# Altium PCB RF-UNIT.PcbDoc (part 1 of 4)
Units mm, origin at the board's own origin, x right, y up, seen from the top; angles counter-clockwise.
Board outline 187 x 77 mm, 2 copper layers (Top Layer, Top, Bottom Layer, Bottom); 271 components, 171 nets, 804 pads, 2169 vias.
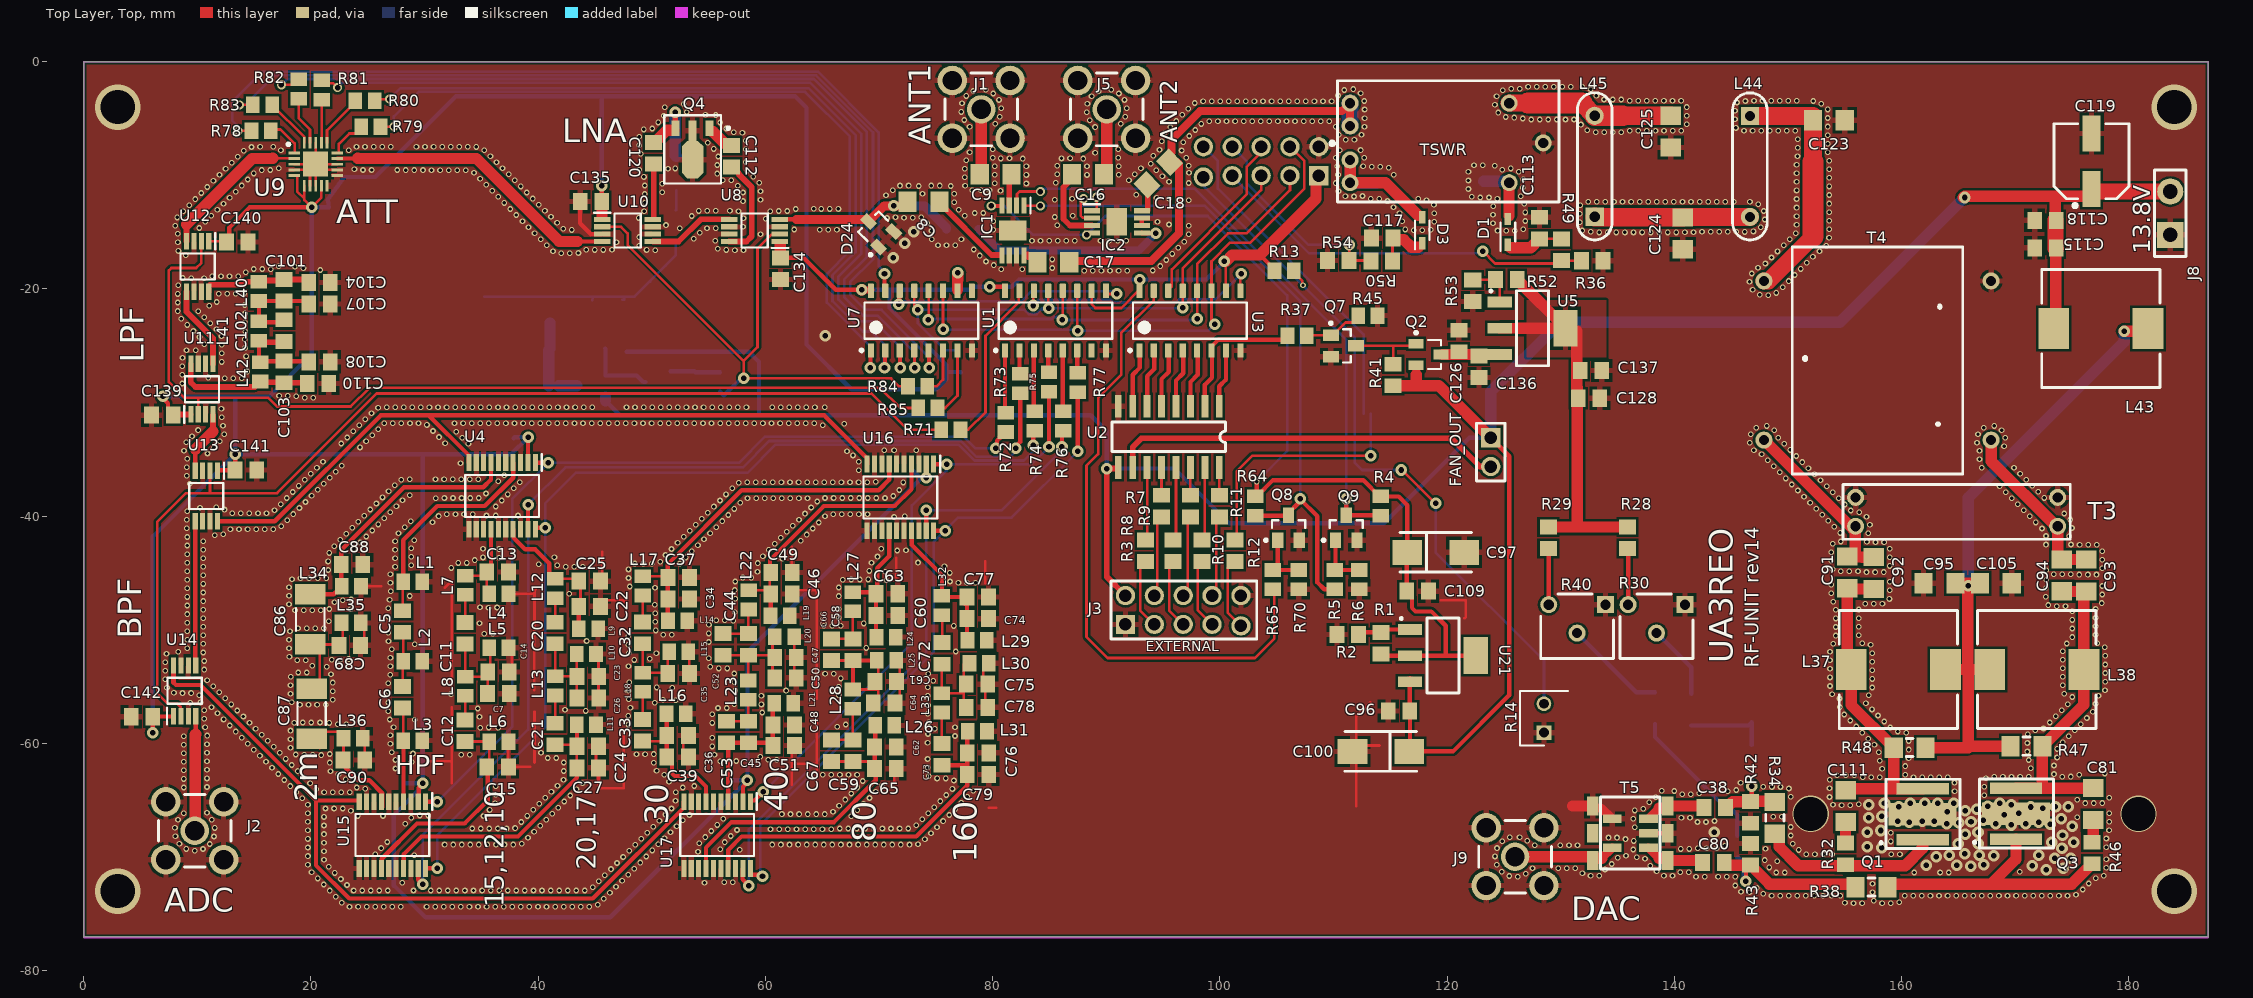
[diagram p0: Top Layer, Top view]
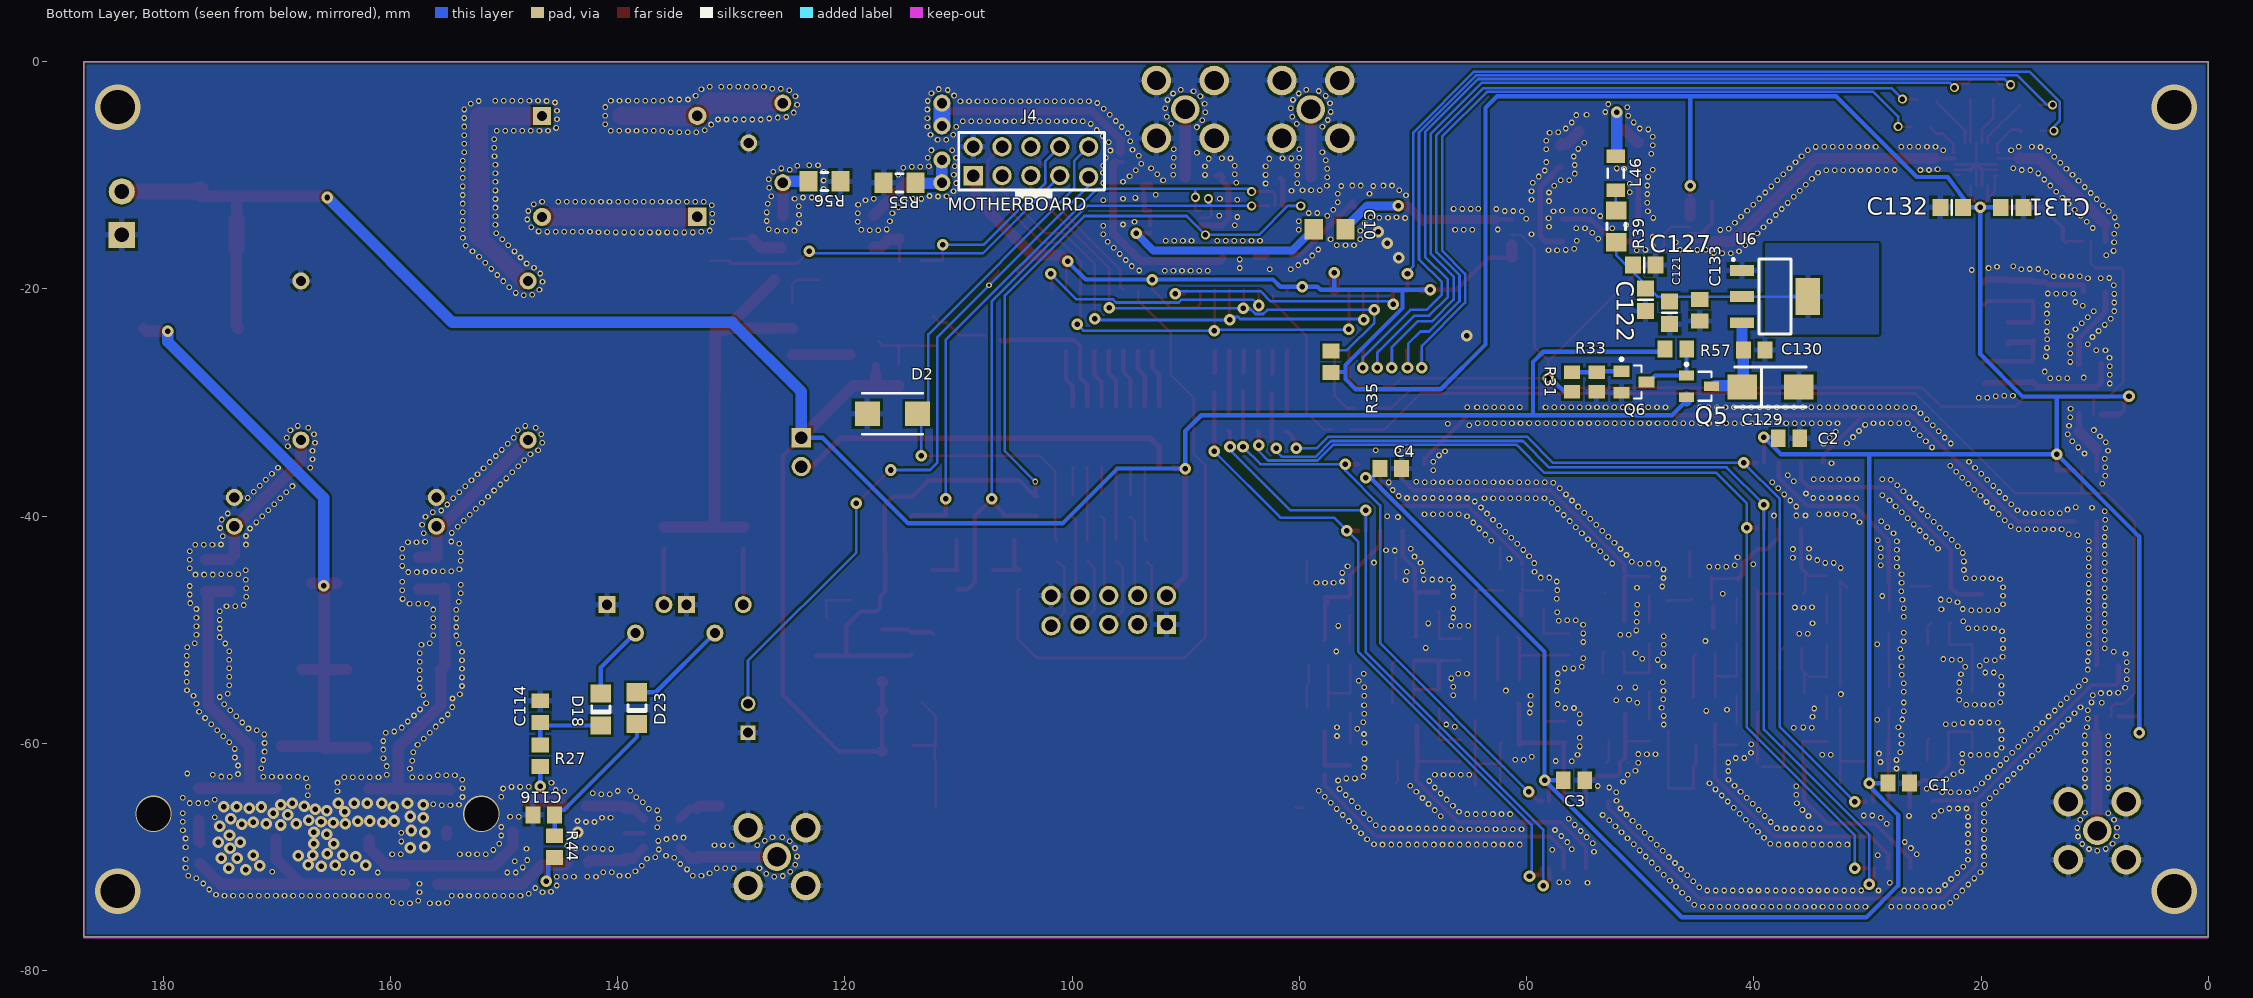
[diagram p1: Bottom Layer, Bottom view, seen from below]

## Layer stack, top to bottom
Top Solder, Top Mask: solder mask 0.0102, Solder Resist, Dk 3.5
Top Layer, Top: signal copper 0.0356
Dielectric 1: dielectric 0.32, FR-4, Dk 4.8
Bottom Layer, Bottom: signal copper 0.0356
Bottom Solder, Bot Mask: solder mask 0.0102, Solder Resist, Dk 3.5

## Board outline
0,-77 187,-77 187,0 0,0

## Design rules (kind name [scope] priority, off if disabled: settings)
BoardOutlineClearance [All] p1: gap=0.2 ignorepadtopadclearanceinfootprint=FALSE except(0.4: Arc-SplitBarrior Arc-SplitContinuation Track-SplitBarrior Track-SplitContinuation SMDPad-SplitBarrior SMDPad-SplitContinuation THPad-SplitBarrior THPad-SplitContinuation Via-SplitBarrior Via-SplitContinuation Fill-SplitBarrior Fill-SplitContinuation Poly-SplitBarrior Poly-SplitContinuation Region-SplitBarrior Region-SplitContinuation Text-SplitBarrior Text-SplitContinuation)
Clearance "Clearance Bottom Layer" [OnLayer('Bottom Layer')] p1: gap=0.203 ignorepadtopadclearanceinfootprint=TRUE except(0.254: Arc-Text Track-Text SMDPad-Text THPad-Text Via-Text Fill-Text Poly-Text Region-Text Text-Text)
Clearance "Clearance Top Layer" [OnLayer('Top Layer')] p2: gap=0.203 ignorepadtopadclearanceinfootprint=TRUE except(0.254: Arc-Text Track-Text SMDPad-Text THPad-Text Via-Text Fill-Text Poly-Text Region-Text Text-Text)
Clearance [All] p3: gap=0.2 ignorepadtopadclearanceinfootprint=FALSE except(0.089: Arc-Arc Arc-Track Arc-SMDPad Track-Track Track-SMDPad SMDPad-SMDPad; 0.127: Arc-Via Track-Via SMDPad-Via THPad-Via Via-Via; 0.254: Arc-Text Track-Text SMDPad-Text THPad-Text Via-Text Fill-Text Poly-Text Region-Text Text-Text)
HoleSize [All] p1: absolutevalues=TRUE maxlimit=6.3 minlimit=0.2 maxpercent=80.000 minpercent=20.000
MinimumAnnularRing [All] p1: minimumring=0.076
MinimumSolderMaskSliver [All] p1: minsoldermaskwidth=0.01
PolygonConnect PolygonConnect_1 [All] p1: thpad.connectstyle=Relief thpad.reliefconductorwidth=0.508 thpad.reliefentries=4 thpad.polygonreliefangle="90 Angle" thpad.airgapwidth=0.254 smdpad.connectstyle=Relief smdpad.reliefconductorwidth=0.508 smdpad.reliefentries=4 smdpad.polygonreliefangle="90 Angle" smdpad.airgapwidth=0.254 via.connectstyle=Direct via.reliefconductorwidth=0.508 via.reliefentries=4 via.polygonreliefangle="90 Angle" via.airgapwidth=0.254
RoomDefinition "SWR Tandem Match" [InComponentClass('SWR Tandem Match')] p1: confinementstyle=ConfineIn formatcopy=TRUE lockcomponents=FALSE outline 0,-77 187,-77 187,-0.127 0,-0.127
RoomDefinition RF_AMP [InComponentClass('RF_AMP')] p2: confinementstyle=ConfineIn formatcopy=TRUE lockcomponents=FALSE outline 0,-77 187,-77 187,0 0,0
RoomDefinition CONTROL [InComponentClass('CONTROL')] p3: confinementstyle=ConfineIn formatcopy=TRUE lockcomponents=FALSE outline 0,-77 187,-77 187,0 0,0
RoomDefinition CONN [InComponentClass('CONN')] p4: confinementstyle=ConfineIn formatcopy=TRUE lockcomponents=FALSE outline 0,-77 187,-77 187,0 0,0
RoomDefinition BPF [InComponentClass('BPF')] p5: confinementstyle=ConfineIn formatcopy=TRUE lockcomponents=FALSE outline 0,-77 187,-77 187,-0.127 0,-0.127
RoomDefinition LNA [InComponentClass('LNA')] p6 off: confinementstyle=ConfineIn formatcopy=TRUE lockcomponents=FALSE outline 0,-77 187,-77 187,0 0,0
RoutingCorners [All] p1: cornerstyle=Round minsetback=2.54 maxsetback=2.54
RoutingVias [All] p1: holewidth=0.5 width=1 viastyle="Through Hole" minholewidth=0.2 minwidth=0.45 maxholewidth=1 maxwidth=2
SilkToSilkClearance [All] p1: silktosilkclearance=0.01
SilkToSolderMaskClearance [IsPad] p1: minsilkscreentomaskgap=0.01 clearancetoexposedcopper=TRUE
SolderMaskExpansion [All] p1: expansion=0.102
Width [All] p1: maxlimit=2.54 minlimit=0.089 preferedwidth=0.381
25 further rules are at their usual default settings.

## Classes and differential pairs
component class "SWR Tandem Match": C113 C117 C123 C124 C125 D1 D3 L44 L45 R36 R49 R50 R54 R55 R56 TSWR
component class RF_AMP: C38 C80 C81 C91 C92 C93 C94 C95 C105 C111 C114 C115 C116 C118 C119 C126 C128 C136 C137 D18 D23 J8 L37 L38 L43 Q1 Q2 Q3 Q7 R27 R28 R29 R30 R32 R34 R37 R38 R40 R41 R42 R43 R44 R45 R46 R47 R48 R52 R53 T3 T4 T5 U5
component class LNA: C101 C102 C103 C104 C107 C108 C110 C112 C120 C121 C122 C127 C129 C130 C131 C132 C133 C134 C135 C139 C140 L40 L41 L42 L46 Q4 Q5 Q6 R31 R33 R39 R57 U6 U8 U9 U10 U11 U12
component class CONTROL: FAN_OUT Q8 Q9 R4 R5 R6 R13 R14 R35 R64 R65 R70 R71 R72 R73 R74 R75 R76 R77 R78 R79 R80 R81 R82 R83 R84 R85 U1 U2 U3 U7
component class CONN: C8 C9 C10 C16 C17 C18 C96 C97 C100 C109 D2 D24 IC1 IC2 J1 J2 J3 J4 J5 J9 R1 R2 R3 R7 R8 R9 R10 R11 R12 U21
component class BPF: C1 C2 C3 C4 C5 C6 C7 C11 C12 C13 C14 C15 C20 C21 C22 C23 C24 C25 C26 C27 C32 C33 C34 C35 C36 C37 C39 C44 C45 C46 C47 C48 C49 C50 C51 C52 C53 C58 C59 C60 C61 C62 C63 C64 C65 C66 C67 C72 C73 C74 C75 C76 C77 C78 C79 C86 C87 C88 C89 C90 C141 C142 L1 L2 L3 L4 L5 L6 L7 L8 L9 L10 L11 L12 L13 L14 L15 L16 L17 L18 L19 L20 L21 L22 L23 L24 L25 L26 L27 L28 L29 L30 L31 L32 L33 L34 L35 L36 U4 U13 U14 U15 U16 U17

## Components (designator, comment, footprint, x,y, rotation, side; value= is the part's Value field where it differs from the comment)
C1 "CAP_0805" CAP_0805 27.051,-63.5 r0 bottom value=100n
C2 "CAP_0805" CAP_0805 36.703,-33.147 r0 bottom value=100n
C3 "CAP_0805" CAP_0805 55.626,-63.246 r0 bottom value=100n
C4 "CAP_0805" CAP_0805 71.755,-35.814 r0 bottom value=100n
C5 "CAP_0805" CAP_0805 28.07,-49.476 r90 top value=47pF
C6 "CAP_0805" CAP_0805 28.07,-56.143 r90 top value=33pF
C7 "CAP_0805" CAP_0805 36.703,-55.626 r180 top value=39pF
C8 "CAP_1206" CAP_1206 73.914,-12.319 r180 top value="2.2uF 100V"
C9 "CAP_1206" CAP_1206 80.264,-9.906 r0 top value="2.2uF 100V"
C10 "CAP_1206" CAP_1206 77.343,-14.732 r180 bottom value="2.2uF 100V"
C11 "CAP_0805" CAP_0805 33.577,-50.515 r90 top value=75pF
C12 "CAP_0805" CAP_0805 33.577,-59.088 r90 top value=61pF
C13 "CAP_0805" CAP_0805 36.637,-44.915 r180 top value=47pF
C14 "CAP_0805" CAP_0805 36.715,-53.721 r180 top value=100pF
C15 "CAP_0805" CAP_0805 36.637,-62.06 r180 top value=120pF
C16 "CAP_1206" CAP_1206 88.392,-9.906 r180 top value="2.2uF 100V"
C17 "CAP_1206" CAP_1206 85.344,-17.653 r0 top value="2.2uF 100V"
C18 "CAP_1206" CAP_1206 94.585,-9.841 r45 top value="2.2uF 100V"
C20 "CAP_0805" CAP_0805 41.504,-50.485 r90 top value=27pF
C21 "CAP_0805" CAP_0805 41.504,-59.375 r90 top value=27pF
C22 "CAP_0805" CAP_0805 44.731,-47.943 r180 top value=68pF
C23 "CAP_0805" CAP_0805 44.577,-54.102 r180 top value=120pF
C24 "CAP_0805" CAP_0805 44.564,-60.252 r180 top value=68pF
C25 "CAP_0805" CAP_0805 44.731,-45.72 r180 top value=10pF
C26 "CAP_0805" CAP_0805 44.577,-56.007 r180 top value=27pF
C27 "CAP_0805" CAP_0805 44.564,-62.157 r180 top value=10pF
C32 "CAP_0805" CAP_0805 49.192,-50.479 r90 top value=47pF
C33 "CAP_0805" CAP_0805 49.192,-59.052 r90 top value=47pF
C34 "CAP_0805" CAP_0805 52.57,-47.292 r180 top value=120pF
C35 "CAP_0805" CAP_0805 52.565,-53.85 r180 top value=220pF
C36 "CAP_0805" CAP_0805 52.478,-59.309 r180 top value=120pF
C37 "CAP_0805" CAP_0805 52.57,-45.387 r180 top value=33pF
C38 "CAP_0805" CAP_0805 143.764,-65.659 r180 top value=100n
C39 "CAP_0805" CAP_0805 52.478,-61.214 r180 top value=33pF
C44 "CAP_0805" CAP_0805 58.496,-51.49 r90 top value=51pF
C45 "CAP_0805" CAP_0805 58.496,-59.203 r90 top value=51pF
C46 "CAP_0805" CAP_0805 61.622,-46.863 r180 top value=220pF
C47 "CAP_0805" CAP_0805 61.976,-52.451 r180 top value=360pF
C48 "CAP_0805" CAP_0805 61.81,-58.377 r180 top value=220pF
C49 "CAP_0805" CAP_0805 61.622,-44.958 r180 top value=33pF
C50 "CAP_0805" CAP_0805 61.976,-54.229 r180 top value=51pF
C51 "CAP_0805" CAP_0805 61.81,-60.19 r180 top value=33pF
C52 "CAP_0805" CAP_0805 56.273,-51.49 r90 top value=18pF
C53 "CAP_0805" CAP_0805 56.591,-59.203 r90 top value=18pF
C58 "CAP_0805" CAP_0805 67.706,-51.955 r90 top value=100pF
C59 "CAP_0805" CAP_0805 67.706,-60.845 r90 top value=100pF
C60 "CAP_0805" CAP_0805 70.893,-48.736 r180 top value=360pF
C61 "CAP_0805" CAP_0805 70.793,-54.562 r180 top value=680pF
C62 "CAP_0805" CAP_0805 70.766,-60.325 r180 top value=360pF
C63 "CAP_0805" CAP_0805 70.893,-46.831 r180 top value=68pF
C64 "CAP_0805" CAP_0805 70.654,-56.467 r180 top value=100pF
C65 "CAP_0805" CAP_0805 70.766,-62.23 r180 top value=68pF
C66 "CAP_0805" CAP_0805 65.801,-51.955 r90 top value=39pF
C67 "CAP_0805" CAP_0805 65.801,-60.845 r90 top value=39pF
C72 "CAP_0805" CAP_0805 75.563,-52.282 r90 top value=200pF
C73 "CAP_0805" CAP_0805 75.54,-61.172 r90 top value=200pF
C74 "CAP_0805" CAP_0805 78.894,-49.022 r180 top value=820pF
C75 "CAP_0805" CAP_0805 78.829,-54.791 r180 top value=1000pF
C76 "CAP_0805" CAP_0805 78.911,-60.833 r180 top value=820pF
C77 "CAP_0805" CAP_0805 78.894,-47.117 r180 top value=120pF
C78 "CAP_0805" CAP_0805 78.829,-56.823 r180 top value=220pF
C79 "CAP_0805" CAP_0805 78.911,-62.738 r180 top value=120pF
C80 "CAP_0805" CAP_0805 143.637,-70.485 r180 top value=100n
C81 "CAP_1206" CAP_1206 176.866,-65.341 r90 top value=47nF
C86 "CAP_0805" 5025[2010] 19.939,-49.081 r90 top value=6.5-30pF
C87 "CAP_0805" 5025[2010] 20.066,-57.377 r90 top value=6.5-30pF
C88 "CAP_0805" CAP_0805 23.825,-44.268 r180 top value=120pF
C89 "CAP_0805" CAP_0805 23.622,-51.367 r180 top value=100pF
C90 "CAP_0805" CAP_0805 23.984,-61.463 r180 top value=120pF
C91 "CAP_1206" CAP_1206 155.219,-44.946 r90 top value="2.2uF 100V"
C92 "CAP_1206" CAP_1206 157.533,-45.008 r90 top value="1n8 100V"
C93 "CAP_1206" CAP_1206 176.257,-45.229 r90 top value="2.2uF 100V"
C94 "CAP_1206" CAP_1206 174.108,-45.213 r90 top value="1n8 100V"
C95 "CAP_1206" CAP_1206 163.338,-45.911 r180 top value="2.2uF 100V"
C96 "100n" CAP_0805 115.57,-57.15 r0 top
C97 "10uF" CAPAE_5.3x5.3h6.1 118.999,-43.18 r0 top
C100 "10uF" CAPAE_5.3x5.3h6.1 114.173,-60.706 r180 top
C101 "CAP_0805" CAP_0805 17.653,-20.32 r90 top value=18pF
C102 "CAP_0805" CAP_0805 17.653,-23.876 r90 top value=75pF
C103 "CAP_0805" CAP_0805 17.651,-27.505 r90 top value=33pF
C104 "CAP_0805" CAP_0805 20.955,-19.431 r180 top value=18pF
C105 "CAP_1206" CAP_1206 168.291,-45.898 r0 top value="1n8 100V"
C107 "CAP_0805" CAP_0805 20.955,-21.336 r180 top value=47pF
C108 "CAP_0805" CAP_0805 20.955,-26.416 r180 top value=51pF
C109 "100n" CAP_0805 117.602,-46.609 r180 top
C110 "CAP_0805" CAP_0805 20.828,-28.321 r180 top value=68pF
C111 "CAP_1206" CAP_1206 155.067,-65.532 r90 top value=47nF
C112 "CAP_0805" CAP_0805 57.023,-8.128 r270 top value=10n
C113 "CAP_0805" CAP_0805 128.132,-14.854 r90 top value=100nF
C114 "CAP_0805" CAP_0805 146.812,-57.404 r90 bottom value=100n
C115 "CAP_0805" CAP_0805 172.466,-16.383 r0 top value=1nF
C116 "CAP_0805" CAP_0805 146.304,-66.294 r0 bottom value=100n
C117 "CAP_0805" CAP_0805 114.086,-15.533 r0 top value=100nF
C118 "CAP_0805" CAP_0805 172.466,-13.97 r0 top value=100nF
C119 "CAPAE_6.6x6.6h5.4" CAPAE_6.6x6.6h5.4 176.721,-8.855 r90 top value=47uF
C120 "CAP_0805" CAP_0805 50.165,-8.255 r90 top value=10n
C121 "CAP_0805" 6-0805_M 47.416,-22.107 r90 bottom value=10n
C122 "CAP_0805" 6-0805_M 49.53,-20.955 r90 bottom value=1n
C123 "CAP_1206" CAP_1206 153.593,-5.147 r180 top value=68pF
C124 "CAP_1206" CAP_1206 140.74,-15.111 r90 top value=180pF
C125 "CAP_1206" CAP_1206 139.689,-6.157 r90 top value=68pF
C126 "CAP_0805" CAP_0805 121.031,-24.384 r270 top value=1uF
C127 "CAP_0805" 6-0805_M 49.641,-17.907 r0 bottom value=100p
C128 "CAP_0805" CAP_0805 132.293,-29.624 r0 top value=1uF
C129 "CAPAE_5.3x5.3h6.1" CAPAE_5.3x5.3h6.1 38.536,-28.638 r180 bottom value="10uF 25V"
C130 "CAP_0805" CAP_0805 39.77,-25.387 r0 bottom value=100n
C131 "CAP_0805" 6-0805_M 17.272,-12.827 r0 bottom value=100n
C132 "CAP_0805" 6-0805_M 22.59,-12.827 r180 bottom value=100p
C133 "CAP_0805" CAP_0805 44.765,-22.082 r90 bottom value=100n
C134 "CAP_0805" CAP_0805 61.341,-18.422 r90 top value=100n
C135 "CAP_0805" CAP_0805 44.45,-12.319 r0 top value=100n
C136 "CAP_0805" CAP_0805 122.809,-27.051 r90 top value=100n
C137 "CAP_0805" CAP_0805 132.461,-27.178 r0 top value=100n
C139 "CAP_0805" CAP_0805 6.731,-31.115 r0 top value=100n
C140 "CAP_0805" CAP_0805 13.716,-15.875 r180 top value=100n
C141 "CAP_0805" CAP_0805 14.478,-35.941 r180 top value=100n
C142 "CAP_0805" CAP_0805 4.941,-57.658 r0 top value=100n
D1 "BAT46JFILM" SOD2513X117N 125.349,-14.986 r90 top
D2 "SMLVT3V3" SMBJ36CATR 115.824,-30.988 r0 bottom
D3 "BAT46JFILM" SOD2513X117N 117.808,-14.839 r90 top
D18 "SS14" SS14 141.478,-57.023 r90 bottom
D23 "SS14" SS14 138.303,-56.896 r90 bottom
D24 "BAV99" SOT23 69.85,-14.859 r45 top
FAN_OUT "51022-0200" 51022-0200 124.478,-34.365 r270 top
IC1 "HMC784AMS8GETR" SOP65P488X110-9N 81.788,-14.859 r270 top
IC2 "HMC784AMS8GETR" SOP65P488X110-9N 90.932,-14.097 r0 top
J1 "ANT1" 31-5431 78.994,-4.2 r180 top
J2 "ADC" 31-5431 9.779,-67.691 r0 top
J3 "EXTERNAL" 90131-0126 95.504,-48.26 r0 top
J4 "MOTHERBOARD" 90131-0126 104.902,-8.763 r180 bottom
J5 "ANT2" 31-5431 90.043,-4.2 r0 top
J8 "13.8V" 1986717-2 183.648,-13.338 r90 top
J9 "DAC" 31-5431 125.984,-69.977 r0 top
L1 "IND_0805" IND_0805 28.966,-45.781 r180 top value=270nH
L2 "IND_0805" IND_0805 28.966,-52.766 r180 top value=82nH
L3 "IND_0805" IND_0805 28.966,-59.751 r180 top value=100nH
L4 "IND_0805" IND_0805 36.537,-46.82 r180 top value=470nH
L5 "IND_0805" IND_0805 36.537,-51.583 r180 top value=150nH
L6 "IND_0805" IND_0805 36.537,-59.838 r180 top value=150nH
L7 "IND_0805" IND_0805 33.577,-46.083 r270 top value=270nH
L8 "IND_0805" IND_0805 33.577,-54.973 r270 top value=330nH
L9 "IND_0805" IND_0805 44.426,-49.893 r180 top value=1.2uH
L10 "IND_0805" IND_0805 44.239,-52.136 r180 top value=680nH
L11 "IND_0805" IND_0805 44.239,-58.347 r180 top value=1.2uH
L12 "IND_0805" IND_0805 41.504,-46.37 r270 top value=3.3uH
L13 "IND_0805" IND_0805 41.504,-54.942 r270 top value=3.3uH
L14 "IND_0805" IND_0805 52.285,-49.197 r180 top value=1.5uH
L15 "IND_0805" IND_0805 52.377,-51.945 r180 top value=1.2uH
L16 "IND_0805" IND_0805 52.153,-57.404 r180 top value=1.5uH
L17 "IND_0805" IND_0805 49.192,-46.139 r270 top value=5.6uH
L18 "IND_0805" IND_0805 49.192,-54.619 r270 top value=5.6uH
L19 "IND_0805" IND_0805 61.297,-48.768 r180 top value=2.7uH
L20 "IND_0805" IND_0805 61.681,-50.612 r180 top value=1.5uH
L21 "IND_0805" IND_0805 61.617,-56.472 r180 top value=2.7uH
L22 "IND_0805" IND_0805 58.547,-47.371 r270 top value=10uH
L23 "IND_0805" IND_0805 58.496,-55.313 r270 top value=10uH
L24 "IND_0805" IND_0805 70.634,-50.641 r180 top value=4.7uH
L25 "IND_0805" IND_0805 70.666,-52.705 r180 top value=2.7uH
L26 "IND_0805" IND_0805 70.507,-58.42 r180 top value=4.7uH
L27 "IND_0805" IND_0805 67.706,-47.537 r270 top value=15uH
L28 "IND_0805" IND_0805 67.706,-56.11 r270 top value=15uH
L29 "IND_0805" IND_0805 78.635,-50.927 r180 top value=6.8uH
L30 "IND_0805" IND_0805 78.811,-52.959 r180 top value=4.7uH
L31 "IND_0805" IND_0805 78.652,-58.928 r180 top value=6.8uH
L32 "IND_0805" IND_0805 75.54,-47.864 r270 top value=33uH
L33 "IND_0805" IND_0805 75.54,-56.437 r270 top value=33uH
L34 "IND_0805" IND_0805 23.566,-46.173 r180 top value=8.2nH
L35 "IND_0805" IND_0805 23.547,-49.398 r180 top value=8.2nH
L36 "IND_0805" IND_0805 23.725,-59.558 r180 top value=8.2nH
L37 "IND_FERRITE_CORE" IND_FERRITE_CORE 159.712,-53.496 r0 top value=10uH
L38 "IND_FERRITE_CORE" IND_FERRITE_CORE 171.898,-53.491 r0 top value=10uH
L40 "IND_0805" IND_0805 15.43,-20.218 r270 top value=120nH
L41 "IND_0805" IND_0805 15.43,-23.71 r270 top value=82nH
L42 "IND_0805" IND_0805 15.533,-27.305 r270 top value=150nH
L43 "IND_FERRITE_CORE" IND_FERRITE_CORE 177.535,-23.481 r180 top value=10uH
L44 "IND_FERRITE_CORE" IND_FERRITE_CORE_1 146.654,-9.22 r270 top value=200nH
L45 "IND_FERRITE_CORE" IND_FERRITE_CORE_1 132.988,-9.214 r90 top value=200nH
L46 "IND_1206" IND_1206 52.157,-9.822 r90 bottom value=220nH
Q1 "RD07MVS1" RD07MVS1 161.567,-66.213 r0 top
Q2 "MOSFET_ENH_PD" SOT23 118.364,-25.781 r270 top value=IRLML9301
Q3 "RD07MVS1" RD07MVS1 169.791,-66.173 r0 top
Q4 "PGA-103+" SOT89 53.594,-7.239 r180 top
Q5 "MOSFET_ENH_PD" SOT23 44.831,-28.575 r270 bottom value=IRLML9301
Q6 "BSS123" FAIR-SOT23-3_V 50.546,-28.194 r270 bottom
Q7 "BSS123" FAIR-SOT23-3_V 110.871,-25.019 r270 top
Q8 "BSS123" FAIR-SOT23-3_V 106.045,-41.021 r0 top
Q9 "BSS123" FAIR-SOT23-3_V 111.125,-41.021 r0 top
R1 "RES_0805" RES_0805 114.173,-51.181 r270 top value=120
R2 "RES_0805" RES_0805 111.252,-50.419 r180 top value=680
R3 "RES_0805" RES_0805 93.472,-43.053 r90 top value=560
R4 "1k" RESC2013X60X40NL20T25 114.173,-39.116 r270 top
R5 "30k" RESC2013X60X40NL20T25 110.109,-45.593 r270 top
R6 "30k" RESC2013X60X40NL20T25 112.268,-45.593 r90 top
R7 "RES_0805" RES_0805 94.869,-39.116 r90 top value=560
R8 "RES_0805" RES_0805 95.885,-43.053 r90 top value=560
R9 "RES_0805" RES_0805 97.409,-39.116 r90 top value=560
R10 "RES_0805" RES_0805 98.425,-43.053 r90 top value=560
R11 "RES_0805" RES_0805 99.949,-39.116 r90 top value=560
R12 "RES_0805" RES_0805 101.346,-43.053 r90 top value=560
R13 "2k" RESC2013X60X40NL20T25 105.664,-18.415 r0 top
R14 "KTY81/120" TO254P420X460X770-2P 128.524,-59.055 r90 top
R27 "RES_0805" RES_0805 146.812,-61.087 r270 bottom value=56
R28 "RES_0805" RES_0805 135.89,-41.91 r90 top value=1k
R29 "RES_0805" RES_0805 128.905,-41.91 r90 top value=1k
R30 "306J" 306J 138.43,-49.692 r270 top value=1k
R31 "30k" RESC2013X60X40NL20T25 56.007,-28.194 r270 bottom
R32 "RES_0805" RES_0805 155.067,-69.723 r90 top value=560
R33 "30k" RESC2013X60X40NL20T25 53.848,-28.194 r90 bottom
R34 "RES_1206" RES_1206 148.844,-66.548 r270 top value=5.6
R35 "RES_0805" RES_0805 77.216,-26.416 r90 bottom value=1k
R36 "RES_0805" RES_0805 132.773,-17.523 r0 top value=510
R37 "30k" RESC2013X60X40NL20T25 106.807,-24.13 r180 top
R38 "RES_1206" RES_1206 157.353,-72.644 r0 top value=5.6
R39 "RES_1206" RES_1206 52.111,-14.492 r90 bottom value=18
R40 "306J" 306J 131.445,-49.692 r270 top value=1k
R41 "RES_0805" RES_0805 115.259,-27.582 r270 top value=30k
R42 "RES_0805" RES_0805 146.703,-66.077 r90 top value=1k
R43 "RES_0805" RES_0805 146.7,-69.766 r90 top value=1k
R44 "RES_0805" RES_0805 145.542,-69.088 r270 bottom value=56
R45 "30k" RESC2013X60X40NL20T25 113.03,-22.352 r180 top
R46 "RES_0805" RES_0805 176.765,-69.649 r90 top value=560
R47 "RES_1206" RES_1206 170.992,-60.246 r180 top value=300
R48 "RES_1206" RES_1206 160.706,-60.371 r180 top value=300
R49 "RES_0805" RES_0805 130.078,-16.561 r270 top value=0
R50 "RES_0805" RES_0805 114.246,-17.542 r180 top value=0
R52 "RES_0805" RES_0805 125.222,-19.177 r180 top value=200
R53 "RES_0805" RES_0805 122.258,-20.157 r270 top value=1.2k
R54 "RES_0805" RES_0805 110.427,-17.501 r0 top value=510
R55 "RES_1206" RES_1206 115.189,-10.668 r0 bottom value=50
R56 "RES_1206" RES_1206 121.793,-10.541 r180 bottom value=50
R57 "RES_0805" RES_0805 46.863,-25.273 r0 bottom value=30k
R64 "1k" RESC2013X60X40NL20T25 103.124,-39.116 r270 top
R65 "30k" RESC2013X60X40NL20T25 104.648,-45.593 r270 top
R70 "30k" RESC2013X60X40NL20T25 106.934,-45.593 r90 top
R71 "1k" RESC2013X60X40NL20T25 76.327,-32.385 r0 top
R72 "1k" RESC2013X60X40NL20T25 81.153,-31.75 r90 top
R73 "1k" RESC2013X60X40NL20T25 82.423,-28.321 r90 top
R74 "1k" RESC2013X60X40NL20T25 83.693,-31.623 r90 top
R75 "1k" RESC2013X60X40NL20T25 84.963,-28.194 r90 top
R76 "1k" RESC2013X60X40NL20T25 86.233,-31.623 r90 top
R77 "1k" RESC2013X60X40NL20T25 87.503,-28.233 r90 top
R78 "1k" RESC2013X60X40NL20T25 15.621,-6.096 r180 top
R79 "1k" RESC2013X60X40NL20T25 25.273,-5.715 r0 top
R80 "1k" RESC2013X60X40NL20T25 24.765,-3.429 r0 top
R81 "1k" RESC2013X60X40NL20T25 20.955,-2.501 r90 top
R82 "1k" RESC2013X60X40NL20T25 18.923,-2.413 r90 top
R83 "1k" RESC2013X60X40NL20T25 15.748,-3.81 r180 top
R84 "1k" RESC2013X60X40NL20T25 73.406,-28.575 r0 top
R85 "1k" RESC2013X60X40NL20T25 74.295,-30.48 r0 top
T3 "TRANSF_ICORE" Rutrof 164.846,-39.878 r0 top
T4 "TRANSF_ICORE" TRANSF_ICORE 157.881,-26.302 r90 top
T5 "TRANSF_ACORE2" TRANSF_ACORE2 136.126,-67.915 r180 top value="1:1 ADT1-6T"
TSWR "SWR_TANDEM_MATCH" SWR_TANDEM_MATCH 120.111,-7.018 r0 top
U1 "SN74HC595D" D0016A_L 85.538,-22.793 r90 top
U2 "ULN2003BDR" ULN2003BDR 95.504,-33.02 r270 top
U3 "SN74HC595D" D0016A_L 97.362,-22.793 r90 top
U4 "ADG904BRUZ-R" SOP65P640X120-20N 36.83,-38.227 r270 top
U5 "LT1117IST-ADJ" LT1117IST-ADJ 127.524,-23.378 r0 top value=LT1117-ADJ
U6 "AMS1117-5" AMS1117-5 38.146,-20.595 r180 bottom
U7 "SN74HC595D" D0016A_L 73.733,-22.793 r90 top
U8 "ADG918BRMZ" SOP65P490X110-8N 59.055,-14.859 r180 top
U9 "PE4302" QFN50P400X400X90-21N 20.422,-9.029 r0 top
U10 "ADG918BRMZ" SOP65P490X110-8N 47.879,-14.859 r0 top
U11 "ADG918BRMZ" SOP65P490X110-8N 10.414,-28.829 r90 top
U12 "ADG918BRMZ" SOP65P490X110-8N 10.033,-18.034 r270 top
U13 "ADG918BRMZ" SOP65P490X110-8N 10.795,-38.227 r270 top
U14 "ADG918BRMZ" SOP65P490X110-8N 8.89,-55.372 r90 top
U15 "ADG904BRUZ-R" SOP65P640X120-20N 27.178,-68.072 r270 top
U16 "ADG904BRUZ-R" SOP65P640X120-20N 71.882,-38.354 r270 top
U17 "ADG904BRUZ-R" SOP65P640X120-20N 55.753,-68.072 r270 top
U21 "LT1117IST-ADJ" LT1117IST-ADJ 119.634,-52.197 r0 top

## Footprints (in the part's own frame and the unit in brackets; to place one, negate y for a bottom-side part, rotate by r counter-clockwise, add the part's x,y. Pads: shape width x height; smd on the part's side, far side on the other; paste and mask are expansions set on the pad)
6-0805_M [mm] "Chip Resistor, Body 2.0x1.2mm, IPC Low Density"
  rect 1.4x1.5 smd: 1(-1,0) 2(1,0)
  silkscreen extent 0,-0.65 0,0.65, body extent -1.07,-0.7 1.07,0.7, height 0.7
31-5431 [mm]
  round 2.6 hole 1.7: 1(-2.54,-2.54) 2(2.54,-2.54) 3(2.54,2.54) 4(-2.54,2.54)
  round 2.5 hole 1.7: 5(0,0)
  silkscreen extent -3.2,-3.2 3.2,3.2
306J [mm]
  rect 1.5x1.5 hole 0.9: 1(-1.9,2.5)
  round 1.5 hole 0.9: 2(0.6,0) 3(-1.9,-2.5)
  silkscreen extent -2.85,-3.2 2.85,3.2
5025[2010] [mm] "Chip Resistor; Body 5.0 x 2.5 mm (LxW typ)"
  rect 1.8x2.7 smd: 1(-2.2,0) 2(2.2,0)
  silkscreen extent -1,-1.25 1,1.25
51022-0200 [mm]
  rect 1.7x1.7 hole 1.1: 1(-1.27,-0.635)
  round 1.7 hole 1.1: 2(1.27,-0.635)
  silkscreen extent -2.54,-1.91 2.54,0.64
90131-0126 [mm]
  rect 1.7x1.7 hole 1.1: 1(-3.81,-1.27)
  round 1.7 hole 1.1: 2(-3.81,1.27) 3(-1.27,-1.27) 4(-1.27,1.27) 5(1.27,-1.27) 6(1.27,1.27) 7(3.81,-1.27) 8(3.81,1.27) 9(6.35,-1.397) 10(6.35,1.27)
  silkscreen extent -5.08,-2.54 7.75,2.54
1986717-2 [mm]
  rect 2.3x2.3 hole 1.3: 1(-1.905,0)
  round 2.3 hole 1.3: 2(1.905,0)
  silkscreen extent -3.81,-1.4 3.81,1.4
AMS1117-5 [mm]
  rect 2.15x0.95 smd: 1(-2.9,2.215) 2(-2.9,-0.085) 3(-2.9,-2.385)
  rect 2.15x3.25 smd: 4(2.9,-0.085)
  silkscreen extent -3.86,-3.38 1.4,3.38
CAP_0805 [mm]
  rect 1.3x1.5 smd: 1(-0.75,0) 2(1.15,0)
CAP_1206 [mm]
  rect 1.6x1.8 smd: 1(-1.4,0) 2(1.4,0)
CAPAE_5.3x5.3h6.1 [mm]
  rect 2.6x2.2 smd: 1(-2.5,0) 2(2.5,0)
  silkscreen extent -3.15,-1.75 3.15,1.75
CAPAE_6.6x6.6h5.4 [mm]
  rect 3.15x1.6 smd: 1(-2.362,0) 2(2.538,0)
  silkscreen extent -4.11,-3.3 3.39,3.3
D0016A_L [mm] "SOIC, 16-Leads, Body 10x4mm, Pitch 1.27mm, IPC High Density"
  rrect18% 1.25x0.55 smd: 1(-2.625,4.445) 2(-2.625,3.175) 3(-2.625,1.905) 4(-2.625,0.635) 5(-2.625,-0.635) 6(-2.625,-1.905) 7(-2.625,-3.175) 8(-2.625,-4.445) 9(2.625,-4.445) 10(2.625,-3.175) 11(2.625,-1.905) 12(2.625,-0.635) 13(2.625,0.635) 14(2.625,1.905) 15(2.625,3.175) 16(2.625,4.445)
  silkscreen extent -2.75,-5 1.6,5.39, body extent -3,-4.95 3,4.95, height 1.59
FAIR-SOT23-3_V [mm] "SOT23, 3-Leads, Body 2.92x1.3mm, Pitch 0.95mm"
  rect 1x1.4 smd: 1(-0.95,-1.1) 2(0.95,-1.1) 3(0,1.1)
  silkscreen extent -2.12,-1.23 1.46,0.65, body extent -1.46,-0.65 1.46,0.65, height 1.2
IND_0805 [mm]
  rect 1.2x1.45 smd: 1(-0.85,0) 2(0.85,0)
IND_1206 [mm]
  rect 1.2x1.6 smd: 1(-1.5,0) 2(1.5,0)
  silkscreen extent -0.4,-0.7 0.4,0.7
IND_FERRITE_CORE [mm]
  rect 2.7x3.6 smd: 1(-4.15,0) 2(4.15,0)
  silkscreen extent -5.2,-5.2 5.2,5.2
IND_FERRITE_CORE_1 [mm]
  rect 1.6x1.6 hole 0.9: 1(-4.445,0)
  round 1.6 hole 0.9: 2(4.445,0)
  silkscreen extent -6.47,-1.52 6.47,1.52
LT1117IST-ADJ [mm]
  rect 2.15x0.95 smd: 1(-2.9,2.215) 2(-2.9,-0.085) 3(-2.9,-2.385)
  rect 2.15x3.25 smd: 4(2.9,-0.085)
  silkscreen extent -3.86,-3.38 1.4,3.38
QFN50P400X400X90-21N [mm]
  rect 1x0.25 smd: 1(-1.9,1) 2(-1.9,0.5) 3(-1.9,0) 4(-1.9,-0.5) 5(-1.9,-1) 11(1.9,-1) 12(1.9,-0.5) 13(1.9,0) 14(1.9,0.5) 15(1.9,1)
  rect 0.25x1 smd: 6(-1,-1.9) 7(-0.5,-1.9) 8(0,-1.9) 9(0.5,-1.9) 10(1,-1.9) 16(1,1.9) 17(0.5,1.9) 18(0,1.9) 19(-0.5,1.9) 20(-1,1.9)
  rect 2.2x2.2 smd: 21(0,0)
  silkscreen extent -2.52,1.63 -2.27,1.87, body extent -2.05,-2.05 2.05,2.05, height 0.9
RD07MVS1 [mm]
  rect 4.6x1 smd: 1(0.285,2.22) 3(0.285,-2.28)
  rect 6x2 smd: 2(0.285,-0.03)
  silkscreen extent -3.56,-3.05 3.56,3.05
RES_0805 [mm]
  rect 1.3x1.5 smd: 1(-0.95,0) 2(0.95,0)
RES_1206 [mm]
  rect 1.6x1.8 smd: 1(-1.4,0) 2(1.4,0)
  silkscreen extent -0.3,-0.8 0.3,0.8
RESC2013X60X40NL20T25 [mm] "Chip Resistor, 2-Leads, Body 2.00x1.25mm, IPC Medium Density"
  rect 1.2x1.45 smd: 1(-0.85,0) 2(0.85,0)
  body extent -1.1,-0.72 1.1,0.72, height 0.6
Rutrof [mm]
  round 1.5 hole 0.9: 1(8.89,-1.016) 2(-8.89,1.524) 3(8.89,1.524) 4(-8.89,-1.016)
  silkscreen extent -10,-2.16 10,2.67
SMBJ36CATR [mm]
  rect 2.2x2.15 smd: 1(-2.2,0) 2(2.2,0)
  silkscreen extent -2.68,-1.81 2.68,1.81, body extent -3.08,-1.81 3.09,1.81, height 2.75
SOD2513X117N [mm]
  rect 1.085x0.55 smd: 1(-1.14,0) 2(1.14,0)
  silkscreen extent -1.68,-0.64 0.83,0.64, body extent -1.25,-0.64 1.25,0.64, height 1.17
SOP65P488X110-9N [mm]
  rect 1.4x0.45 smd: 1(-2.2,0.975) 2(-2.2,0.325) 3(-2.2,-0.325) 4(-2.2,-0.975) 5(2.2,-0.975) 6(2.2,-0.325) 7(2.2,0.325) 8(2.2,0.975)
  rect 1.78x2.41 smd: 9(0,0)
  silkscreen extent -2.9,1.55 -1.5,1.55, body extent -2.44,-1.5 2.44,1.5, height 1.1
SOP65P490X110-8N [mm]
  rect 1.45x0.45 smd: 1(-2.225,0.975) 2(-2.225,0.325) 3(-2.225,-0.325) 4(-2.225,-0.975) 5(2.225,-0.975) 6(2.225,-0.325) 7(2.225,0.325) 8(2.225,0.975)
  silkscreen extent -2.95,-1.5 1.15,1.55, body extent -2.45,-1.5 2.45,1.5, height 1.1
SOP65P640X120-20N [mm]
  rect 1.475x0.45 smd: 1(-2.938,2.925) 2(-2.938,2.275) 3(-2.938,1.625) 4(-2.938,0.975) 5(-2.938,0.325) 6(-2.938,-0.325) 7(-2.938,-0.975) 8(-2.938,-1.625) 9(-2.938,-2.275) 10(-2.938,-2.925) 11(2.938,-2.925) 12(2.938,-2.275) 13(2.938,-1.625) 14(2.938,-0.975) 15(2.938,-0.325) 16(2.938,0.325) 17(2.938,0.975) 18(2.938,1.625) 19(2.938,2.275) 20(2.938,2.925)
  silkscreen extent -3.67,-3.25 1.85,3.5, body extent -3.2,-3.25 3.2,3.25, height 1.2
SOT23 [mm] "SOT-23; 3 Leads; Body 3.0 x 2.6 mm, inc. leads (LxW max)"
  rect 0.85x1.3 smd: 1(-0.95,-1.1) 2(0.95,-1.1) 3(0,1.1)
  silkscreen extent -2.05,-1.22 1.28,1.1
SOT89 [mm] "SOT-89; Body 4.6 x 4.25 mm, inc. leads (LxW max)"
  oct 1.9x3.3 smd: 0(0,1.388)
  rect 0.7x1.35 smd: 1(-1.5,-1.388) 3(1.5,-1.388)
  rect 0.7x1.8 smd: 2(0,-1.162)
  silkscreen extent -3.28,-2.51 2.5,3.49
SS14 [mm]
  rect 1.6x1.8 smd: 1(-1.4,0) 2(1.4,0)
  silkscreen extent -0.3,-0.8 0.3,0.8
SWR_TANDEM_MATCH [mm]
  round 1.5 hole 0.9: 1(5.355,3.365) 2(-8.645,3.365) 3(5.355,-3.635) 4(-8.645,-3.635) 5(-8.645,1.365) 6(-8.645,-1.635) 7(8.355,-0.135)
  silkscreen extent -9.74,-5.34 9.74,5.34
TO254P420X460X770-2P [mm]
  rect 1.29x1.29 hole 0.86: 1(0,0)
  round 1.29 hole 0.86: 2(2.54,0)
  silkscreen extent -1.13,-2.1 3.67,2.1, body extent -1.03,-2.1 3.57,2.1, height 7.6
TRANSF_ACORE2 [mm]
  rect 1x1.65 smd: 1(-3.3,2.4) 2(-3.3,0) 3(-3.3,-2.4) 4(3.3,-2.4) 5(3.3,0) 6(3.3,2.4)
  rect 1.65x0.76 smd: 7(-1.59,1.27) 8(-1.59,0) 9(-1.59,-1.27) 10(1.59,1.27) 11(1.59,-1.27)
  silkscreen extent -2.61,-3.21 2.61,3.13
TRANSF_ICORE [mm]
  round 1.5 hole 0.9: 1(-7,10) 2(7,10) 3(-7,-10) 4(7,-10)
  silkscreen extent -10,-7.5 10,7.5
ULN2003BDR [mm]
  rect 2x0.6 smd: 1(-2.7,4.445) 2(-2.7,3.175) 3(-2.7,1.905) 4(-2.7,0.635) 5(-2.7,-0.635) 6(-2.7,-1.905) 7(-2.7,-3.175) 8(-2.7,-4.445) 9(2.7,-4.445) 10(2.7,-3.175) 11(2.7,-1.905) 12(2.7,-0.635) 13(2.7,0.635) 14(2.7,1.905) 15(2.7,3.175) 16(2.7,4.445)
  silkscreen extent -1.3,-5 1.3,5

## Part data
C96 C109: library part CAP_0805, "CAP_0805"
C97 C100: library part EEEFC_sizeB, "EEEFC_sizeB"
D1 D3: "Diode", Manufacturer_Name=STMicroelectronics, Mouser Part Number=511-BAT46JFILM, RS Part Number=7146847P, Allied_Number=70389791, Allied Price/Stock=http://www.alliedelec.com/stmicroelectronics-bat46jfilm/70389791/, Datasheet Link=http://www.st.com/web/en/resource/technical/document/datasheet/CD00004930.pdf, Height=1.17mm, Manufacturer_Part_Number=BAT46JFILM, Mouser Price/Stock=https://www.mouser.co.uk/ProductDetail/STMicroelectronics/BAT46JFILM?qs=69%252BgXnvv5lrVjJqgcSQKbQ%3D%3D, RS Price/Stock=http://uk.rs-online.com/web/p/products/7146847P
D2: "Diode", Manufacturer_Name=STMicroelectronics, Mouser Part Number=511-SMLVT3V3, RS Part Number=5444821P, Allied_Number=70013736, Allied Price/Stock=http://www.alliedelec.com/stmicroelectronics-smlvt3v3/70013736/, Datasheet Link=http://www.st.com/web/en/resource/technical/document/datasheet/CD00000923.pdf, Height=2.65mm, Manufacturer_Part_Number=SMLVT3V3, Mouser Price/Stock=https://www.mouser.com/Search/Refine.aspx?Keyword=511-SMLVT3V3, RS Price/Stock=http://uk.rs-online.com/web/p/products/5444821P
IC1 IC2: "Integrated Circuit", Manufacturer_Name="Analog Devices", Mouser Part Number=584-HMC784AMS8GETR, Datasheet Link=https://componentsearchengine.com/Datasheets/1/HMC784AMS8GETR.pdf, Height=1.1mm, Manufacturer_Part_Number=HMC784AMS8GETR, Mouser Price/Stock=https://www.mouser.co.uk/ProductDetail/Analog-Devices/HMC784AMS8GETR?qs=cslStgdnz9MA9T236Uh9mQ%3D%3D
J1 J2 J5 J9: library part 31-5431, "31-5431"
J3 J4: library part 90131-0126, "90131-0126"
J8: library part 1986717-2
L37 L38 L43 L44 L45: "Inductor"
Q2 Q4 Q5: "MOSFET"
Q6 Q7 Q8 Q9: library part CMP-2000-04934-1, "N-Channel Logic Level Enhancement Mode Field Effect Transistor, 1.7 V, -55 to 150 degC, 3-Pin SOT-23, RoHS, Tape and Reel", Manufacturer=Fairchild, Maximum Continuous Drain Current=0.17A, Maximum Drain Source Voltage=100V, Maximum Gate Source Voltage=±20V, Operating Temperature=-55to150degC, Package=3SOT-23, Package Description="3-Pin Small Outline Transistor, Body 2.92 x 1.325 mm, Pitch 0.95 mm", Package Reference=SOT23-3, Package Version="Rev. 12, 03/2016", Category=MOSFET, Channel Mode=Enhancement, Channel Type=N, Datasheet URL=https://www.fairchildsemi.com/datasheets/BS/BSS123.pdf, Datasheet Version=Jun-03, Manufacturer URL=https://www.fairchildsemi.com/, Mounting=SurfaceMount, Package URL=http://www.fairchildsemi.com/dwg/MA/MA03D.pdf, Packaging=Tape&Reel, Rad Hard=No, RDS-on=6000@10VmOhm, Typical Fall Time=2.4ns, Typical Rise Time=9ns, Typical Turn-Off Delay Time=17ns, Typical Turn-On Delay Time=1.7ns
R4 R5 R6 R13 R31 R33 R37 R45 R64 R65 R70 R71 R72 R73 R74 R75 R76 R77 R78 R79 R80 R81 R82 R83 R84 R85: library part CMP-2001-00626-1, Manufacturer=Panasonic, Part Number=ERA-6AEB303V
R14: library part KTY81_110, "Integrated Circuit", Manufacturer_Name=Nexperia, Manufacturer_Part_Number=KTY81/110, Datasheet Link=https://www.nxp.com/docs/en/data-sheet/KTY81_SER.pdf, Height=4.2mm
T3 T4 T5: "Transformer"
U1 U3 U7: library part CMP-0780-00038-3, "8-Bit Shift Registers With 3-State Output Registers, D0016A, TUBE", F @ Nom Voltage(Max)(Mhz)=28, Generic Part Number=SN74HC595, ICC @ Nom Voltage(Max)(mA)=0.08, Manufacturer="Texas Instruments", Operating Temperature Range(C)="-40 to 85", Rating=Military, tpd @ Nom Voltage(Max)(ns)=34, Voltage(Nom)(V)=6, 3-State Output=Yes, Bits=8, Code_JEDEC="MS-012 variation AC", DatasheetVersion=SCLS041H, Input Type=CMOS, Output Drive (IOL/IOH)(Max)(mA)=7.8/-7.8, Output Type=CMOS, PackageReference=D0016A, PackageVersion=http://www.ti.com/lit/ml/mpds178g/mpds178g.pdf, Technology Family=HC, VCC(Max)(V)=6, VCC(Min)(V)=2
U4 U15 U16 U17: "Integrated Circuit", Manufacturer_Name="Analog Devices", Mouser Part Number=584-ADG904BRUZ-R, RS Part Number=5385019P, Datasheet Link=http://www.analog.com/static/imported-files/data_sheets/ADG904_904R.pdf, Height=1.2mm, Manufacturer_Part_Number=ADG904BRUZ-R, Mouser Price/Stock=https://www.mouser.com/Search/Refine.aspx?Keyword=584-ADG904BRUZ-R, RS Price/Stock=http://uk.rs-online.com/web/p/products/5385019P
U8 U10 U11 U12 U13 U14: "Integrated Circuit", Manufacturer_Name="Analog Devices", Mouser Part Number=584-ADG918BRMZ, RS Part Number=4969212P, Datasheet Link=http://www.analog.com/static/imported-files/data_sheets/ADG918_919.pdf, Height=1.1mm, Manufacturer_Part_Number=ADG918BRMZ, Mouser Price/Stock=https://www.mouser.co.uk/ProductDetail/Analog-Devices/ADG918BRMZ?qs=BpaRKvA4VqHrp1TCwMhfnw%3D%3D, RS Price/Stock=http://uk.rs-online.com/web/p/products/4969212P
U9: library part PE4312C-Z, "Integrated Circuit", Manufacturer_Name=pSemi, Mouser Part Number=N/A, Datasheet Link=https://www.psemi.com/pdf/datasheets/pe4312ds.pdf, Height=0.9mm, Manufacturer_Part_Number=PE4312C-Z, Mouser Price/Stock=https://www.mouser.com/Search/Refine.aspx?Keyword=N%2FA
U21: library part LT1117CST-3.3

## Via types
v1: diameter 0.5, hole 0.3, Top Layer, Top to Bottom Layer, Bottom, tented both sides, 1697 vias
v2: diameter 0.5, hole 0.3, Top Layer, Top to Bottom Layer, Bottom, 318 vias
v3: diameter 1.016, hole 0.486, Top Layer, Top to Bottom Layer, Bottom, tented both sides, 136 vias
v4: diameter 0.8, hole 0.486, Top Layer, Top to Bottom Layer, Bottom, tented both sides, 12 vias
v5: diameter 4, hole 3, Top Layer, Top to Bottom Layer, Bottom, 4 vias
v6: diameter 3.2, hole 3, Top Layer, Top to Bottom Layer, Bottom, 2 vias

## Nets (pads, with @x,y where several pads share a name; then routed paths per layer and width w, separated by ;. In a path a pad name is that pad's centre, name@x,y a point inside that pad or via, vN(x,y) a via of type N, cw(c..) or ccw(c..) an arc to the next point about the centre after c; other vN are vias at no path point)
+3V3: C1.2 C2.2 C3.2 C4.2 C131.2 C132.2 C134.2 C135.2 C139.2 C140.2 C141.2 C142.2 J4.1 R13.1 R35.1 U1.10 U1.16 U3.10 U3.16 U4.2 U7.10 U7.16 U8.1 U9.5 U9.6 U9.9 U10.1 U11.1 U12.1 U13.1 U14.1 U15.2 U16.2 U17.2 | length 416
  Top Layer, Top w0.23: U12.1@11.008,-15.809 12.5,-15.809 C140.2@12.566,-15.875 ; U9.5@18.522,-10.029 18.786,-10.029 18.796,-10.039 18.796,-11.43 19.422,-12.056 ; U9.6@19.422,-10.929 19.422,-12.056 ; U9.9@20.922,-10.929 20.922,-11.971 v3(20.066,-12.827) 19.422,-12.183 19.422,-12.056 ; U1.10@88.713,-20.168 88.713,-21.347 89.044,-21.678 91.332,-21.678 92.94,-20.07 92.94,-19.201 v3(92.964,-19.177) ; v3(100.401,-17.582) 100.508,-17.69 100.508,-20.064 U3.10@100.537,-20.093
  Top Layer, Top w0.381: v3(6.096,-59.055) 6.096,-57.663 C142.2@6.091,-57.658 6.117,-57.632 7.88,-57.632 U14.1@7.915,-57.597 ; v3(6.985,-29.464) 6.985,-29.636 7.422,-30.073 7.422,-30.655 C139.2@7.881,-31.115 ; U13.1@11.77,-36.002 11.805,-35.967 13.301,-35.967 C141.2@13.328,-35.941 13.335,-35.934 v3(13.335,-34.544) ; C140.2@12.566,-15.875 12.827,-15.614 12.827,-14.605 14.605,-12.827 v3(20.066,-12.827) ; U15.2@29.453,-65.134 29.488,-65.099 29.488,-63.902 29.845,-63.545 v3(29.845,-63.5) v3@29.845,-63.373 ; U4.2@39.116,-35.278 v3(39.116,-33.068) ; v3(45.593,-10.922) 45.593,-12.312 C135.2@45.6,-12.319 ; U17.2@58.028,-65.134 58.028,-63.81 58.42,-63.418 v3(58.42,-63.246) ; C134.2@61.31,-17.241 C134.2@61.341,-17.272 63.373,-17.272 66.186,-20.085 v3(68.475,-20.085) ; v3(79.756,-19.812) 81.008,-19.812 81.093,-19.897 U1.16@81.093,-20.093 ; 103.505,-17.018 103.542,-17.018 104.814,-18.29 R13.1@104.814,-18.415
  Top Layer, Top w0.5: C139.2@7.881,-31.115 7.942,-31.054 U11.1@9.439,-31.054
  Top Layer, Top w0.6: v3@68.488,-20.093 U7.16@69.288,-20.093
  Top Layer, Top w1: C135.2@45.6,-12.319 45.627,-12.346 45.627,-13.609 ; C134.2@61.31,-17.241 61.31,-16.109 ; v3(68.475,-20.085) 68.483,-20.093 v3@68.488,-20.093 ; U7.10@76.908,-20.093 v3(76.944,-18.598) ; v3(100.401,-17.582) 100.528,-17.582 101.092,-17.018 103.505,-17.018 108.458,-12.065 108.458,-10.287 J4.1@108.712,-10.033
  Bottom Layer, Bottom w0.381: v3(6.096,-59.055) 6.096,-41.783 v3(13.335,-34.544) ; v3(6.985,-29.464) 13.335,-29.464 ; C131.2@18.272,-12.827 v3(20.066,-12.827) ; C1.2@28.201,-63.5 v3(29.845,-63.5) 29.845,-63.754 27.305,-66.294 27.305,-72.517 30.099,-75.311 46.355,-75.311 v3(58.42,-63.246) ; v3@29.845,-63.373 29.845,-34.544 ; C2.2@37.853,-33.147 37.932,-33.068 v3(39.116,-33.068) 37.64,-34.544 29.845,-34.544 ; v3(45.593,-10.922) 45.593,-3.048 ; C3.2@56.776,-63.246 v3(58.42,-63.246) ; v3(68.475,-20.085) 70.929,-20.072 71.71,-20.068 ; C4.2@72.905,-35.814 72.905,-35.914 73.618,-36.627 v3@73.718,-36.627 ; v3(74.157,-36.627) 73.736,-36.627 58.42,-51.943 v3(58.42,-63.246) ; v3(76.944,-18.598) 76.944,-20.085 ; R35.1@77.216,-27.366 77.167,-27.317 75.946,-27.317 ; v3(100.401,-17.582) 98.806,-19.177 v3(92.964,-19.177) 82.326,-19.177 81.691,-19.812 v3(79.756,-19.812) 78.401,-19.812 78.128,-20.085 76.944,-20.085 ; v3(13.335,-34.544) 29.845,-34.544 ; v3(13.335,-34.544) 13.335,-29.464 ; 13.335,-29.464 16.352,-29.464 20.066,-25.75 v3(20.066,-12.827) ; v3(20.066,-12.827) C132.2@21.59,-12.827 21.484,-12.142 22.944,-10.147 25.667,-10.147 32.766,-3.048 45.593,-3.048 ; 45.593,-3.048 62.611,-3.048 63.627,-4.064 63.627,-24.892 67.564,-28.829 75.057,-28.829 75.946,-27.94 75.946,-27.317 ; 75.946,-27.317 75.946,-26.694 70.929,-21.678 70.929,-20.13 71.71,-20.13 71.755,-20.085 76.944,-20.085
+8: C97.1 C109.2 IC1.4 IC2.4 R1.2 R4.1 R64.1 U21.2 U21.4 | length 89.3
  Top Layer, Top w0.381: v4(79.883,-12.7) 80.778,-12.7 80.813,-12.665 IC1.4@80.813,-12.659 ; v1(103.251,-36.957) 103.251,-38.139 R64.1@103.124,-38.266 103.249,-38.266 104.685,-36.83 112.612,-36.83 114.048,-38.266 R4.1@114.173,-38.266 115.736,-38.266 116.499,-39.029 C97.1@116.499,-43.18 116.452,-43.227 C109.2@116.452,-46.609 116.911,-47.069 116.911,-48.077 117.221,-48.387 118.618,-48.387 119.888,-49.657 119.888,-52.282 ; R1.2@114.173,-52.131 114.324,-52.282 U21.2@116.734,-52.282 119.888,-52.282 ; U21.4@122.534,-52.282 119.888,-52.282
  Bottom Layer, Bottom w0.23: v4(79.883,-12.7) 81.026,-12.7 83.566,-15.24 v4(88.265,-15.24) 89.916,-13.589 98.933,-13.589 105.918,-20.574 105.918,-34.29 v1(103.251,-36.957)
+12: C96.2 C100.1 C115.2 C118.2 C119.1 FAN_OUT.1 J3.2 J8.2 L43.2 Q2.2 Q5.2 R41.2 R57.2 U2.9 U21.3 | length 253.7
  Top Layer, Top w0.381: C100.1@116.673,-60.706 116.753,-60.706 120.523,-60.706 125.476,-55.753 125.476,-34.728 FAN_OUT.1@123.843,-33.095 ; C96.2@116.72,-57.136 U21.3@116.72,-54.596 ; C100.1@116.729,-60.682 C96.2@116.729,-57.174
  Top Layer, Top w0.5: U2.9@91.059,-35.72 90.965,-35.814 v3(90.043,-35.814) 90.043,-45.339 J3.2@91.694,-46.99 J3.2@91.707,-47.003
  Top Layer, Top w0.65: 117.277,-27.545 Q2.2@117.277,-26.72
  Top Layer, Top w1: R41.2@115.259,-28.532 117.277,-28.532 ; C96.2@116.72,-57.136 116.706,-57.15 C96.2@116.729,-57.174 ; U21.3@116.72,-54.596 U21.3@116.734,-54.582 ; C100.1@116.729,-60.682 C100.1@116.753,-60.706 ; 117.277,-27.545 117.277,-28.532 ; FAN_OUT.1@123.843,-33.095 119.279,-28.532 117.277,-28.532 ; v3(165.546,-11.957) 165.43,-11.957 165.488,-11.899 165.55,-11.837 173.529,-11.837 ; L43.2@173.385,-23.481 173.574,-23.292 C115.2@173.574,-16.44 ; C118.2@173.529,-13.936 173.529,-11.837 ; C119.1@176.721,-11.217 176.721,-11.837 173.529,-11.837
  Top Layer, Top w1.4: C118.2@173.529,-13.936 173.529,-16.383 173.529,-16.44 C115.2@173.574,-16.44 ; C119.1@176.721,-11.217 176.937,-11.433 J8.2@183.648,-11.433
  Bottom Layer, Bottom w0.381: Q5.2@45.931,-29.845 47.201,-31.115 59.436,-31.115 ; R57.2@47.813,-25.527 58.537,-25.527 59.436,-26.426 59.436,-31.115 ; FAN_OUT.1@123.843,-33.095 121.972,-33.095 114.427,-40.64 100.838,-40.64 96.012,-35.814 v3(90.043,-35.814) 90.043,-32.512 88.646,-31.115 59.436,-31.115
  Bottom Layer, Bottom w1: Q5.2@45.931,-29.845 Q5.2@45.931,-29.525 ; FAN_OUT.1@123.843,-33.095 123.843,-29.038 129.93,-22.951 154.553,-22.951 v3(165.546,-11.957)
AMP_OUT: C123.2 L44.1 T4.2 | length 22.1
  Top Layer, Top w1.5: T4.2@147.881,-19.302 148.279,-19.302 152.193,-15.389
  Top Layer, Top w1.6: L44.1@146.654,-4.775 152.193,-4.775 C123.2@152.193,-5.147 152.193,-8.802
  Top Layer, Top w1.83: 152.193,-15.389 152.193,-8.802
ANT1_RX: IC1.2 IC2.1 Q9.3 R4.2 | length 56.6
  Top Layer, Top w0.23: IC1.2@82.113,-12.659 82.148,-12.624 82.148,-11.653 82.371,-11.43 v4(84.201,-11.43) ; IC2.1@88.732,-13.122 89.119,-13.122 89.154,-13.087 v4(89.154,-11.938)
  Top Layer, Top w0.381: v3(111.125,-38.481) Q9.3@111.125,-39.921 114.05,-39.921 R4.2@114.173,-40.044
  Bottom Layer, Bottom w0.23: v4(84.201,-11.43) 84.455,-11.176 89.154,-11.176 ; v4(89.154,-11.938) 89.154,-11.176 ; v3(111.125,-38.481) 111.125,-24.511 97.79,-11.176 89.154,-11.176
ANT1_TX: IC1.1 IC2.2 Q8.3 R5.2 R64.2 | length 63.2
  Top Layer, Top w0.23: IC1.1@82.798,-12.7 v4(84.201,-12.7) ; v4(88.011,-12.065) 87.757,-12.319 87.757,-13.577 87.917,-13.737 88.697,-13.737 IC2.2@88.732,-13.772
  Top Layer, Top w0.381: IC1.1@82.763,-12.659 82.763,-12.665 IC1.1@82.798,-12.7 ; R64.2@103.124,-39.966 106,-39.966 Q8.3@106.045,-39.921 106.045,-39.721 106.939,-38.827 106.939,-38.603 v3(107.061,-38.481) 108.585,-40.005 108.585,-45.847 109.181,-46.443 R5.2@110.109,-46.443
  Bottom Layer, Bottom w0.23: v4(84.201,-12.7) 87.757,-12.7 ; v4(88.011,-12.065) 88.011,-12.446 87.757,-12.7 ; v3(107.061,-38.481) 107.061,-21.082 98.679,-12.7 87.757,-12.7
ANT1_TX_OUT: R65.2 U3.15 | length 55.3
  Top Layer, Top w0.23: U3.15@94.187,-20.168 94.187,-21.002 91.313,-23.876 91.313,-27.559 89.281,-29.591 89.281,-34.544 88.265,-35.56 88.265,-50.634 90.114,-52.483 103.092,-52.483 104.775,-50.8 104.775,-46.57 R65.2@104.648,-46.443
ATT_ON_0.5: R83.1 U9.20 | length 4.5
  Top Layer, Top w0.23: R83.1@16.598,-3.81 19.422,-6.634 U9.20@19.422,-7.129
ATT_ON_1: R82.1 U9.19 | length 4.3
  Top Layer, Top w0.23: R82.1@18.923,-3.263 18.923,-4.98 19.922,-5.979 U9.19@19.922,-7.129
ATT_ON_2: R81.1 U9.17 | length 3.8
  Top Layer, Top w0.23: U9.17@20.922,-7.129 20.955,-7.096 R81.1@20.955,-3.351
ATT_ON_4: R80.1 U9.16 | length 4.7
  Top Layer, Top w0.23: U9.16@21.422,-7.129 21.422,-6.047 23.915,-3.554 R80.1@23.915,-3.429
ATT_ON_8: R79.1 U9.15 | length 3.6
  Top Layer, Top w0.23: U9.15@22.322,-8.029 U9.15@22.521,-8.029 ; U9.15@22.467,-7.964 22.467,-7.251 23.393,-6.325 23.938,-6.325 24.423,-5.84 R79.1@24.423,-5.715
ATT_ON_16: R78.1 U9.1 | length 3.8
  Top Layer, Top w0.23: R78.1@16.471,-6.096 16.471,-6.221 16.723,-5.969 17.326,-5.969 18.563,-7.207 18.563,-8.019 18.553,-8.029 U9.1@18.522,-8.029 U9.1@18.45,-8.029
BAND_OUT_0: R11.2 U2.16 | length 2.4
  Top Layer, Top w0.23: R11.2@99.949,-38.166 U2.16@99.949,-35.72
BAND_OUT_1: R10.2 U2.15 | length 6.4
  Top Layer, Top w0.23: R10.2@98.679,-42.103 U2.15@98.679,-35.72
BAND_OUT_2: R9.2 U2.14 | length 2.3
  Top Layer, Top w0.23: R9.2@97.409,-38.039 U2.14@97.409,-35.72
BAND_OUT_3: R8.2 U2.13 | length 6.4
  Top Layer, Top w0.23: R8.2@96.139,-42.103 U2.13@96.139,-35.72